# Altium PCB PROC091F_ASCII.PcbDoc (part 7 of 7)
Units mil, origin at the board's own origin, x right, y up, seen from the top; angles counter-clockwise.
Board outline 3590.95 x 906.17 mil, 8 copper layers (Top Layer, GND1, Sig1, PWR1, PWR2, Sig2, GND2, Bottom Layer), stack 63.146 mil thick; 420 components, 316 nets, 1432 pads, 774 vias.
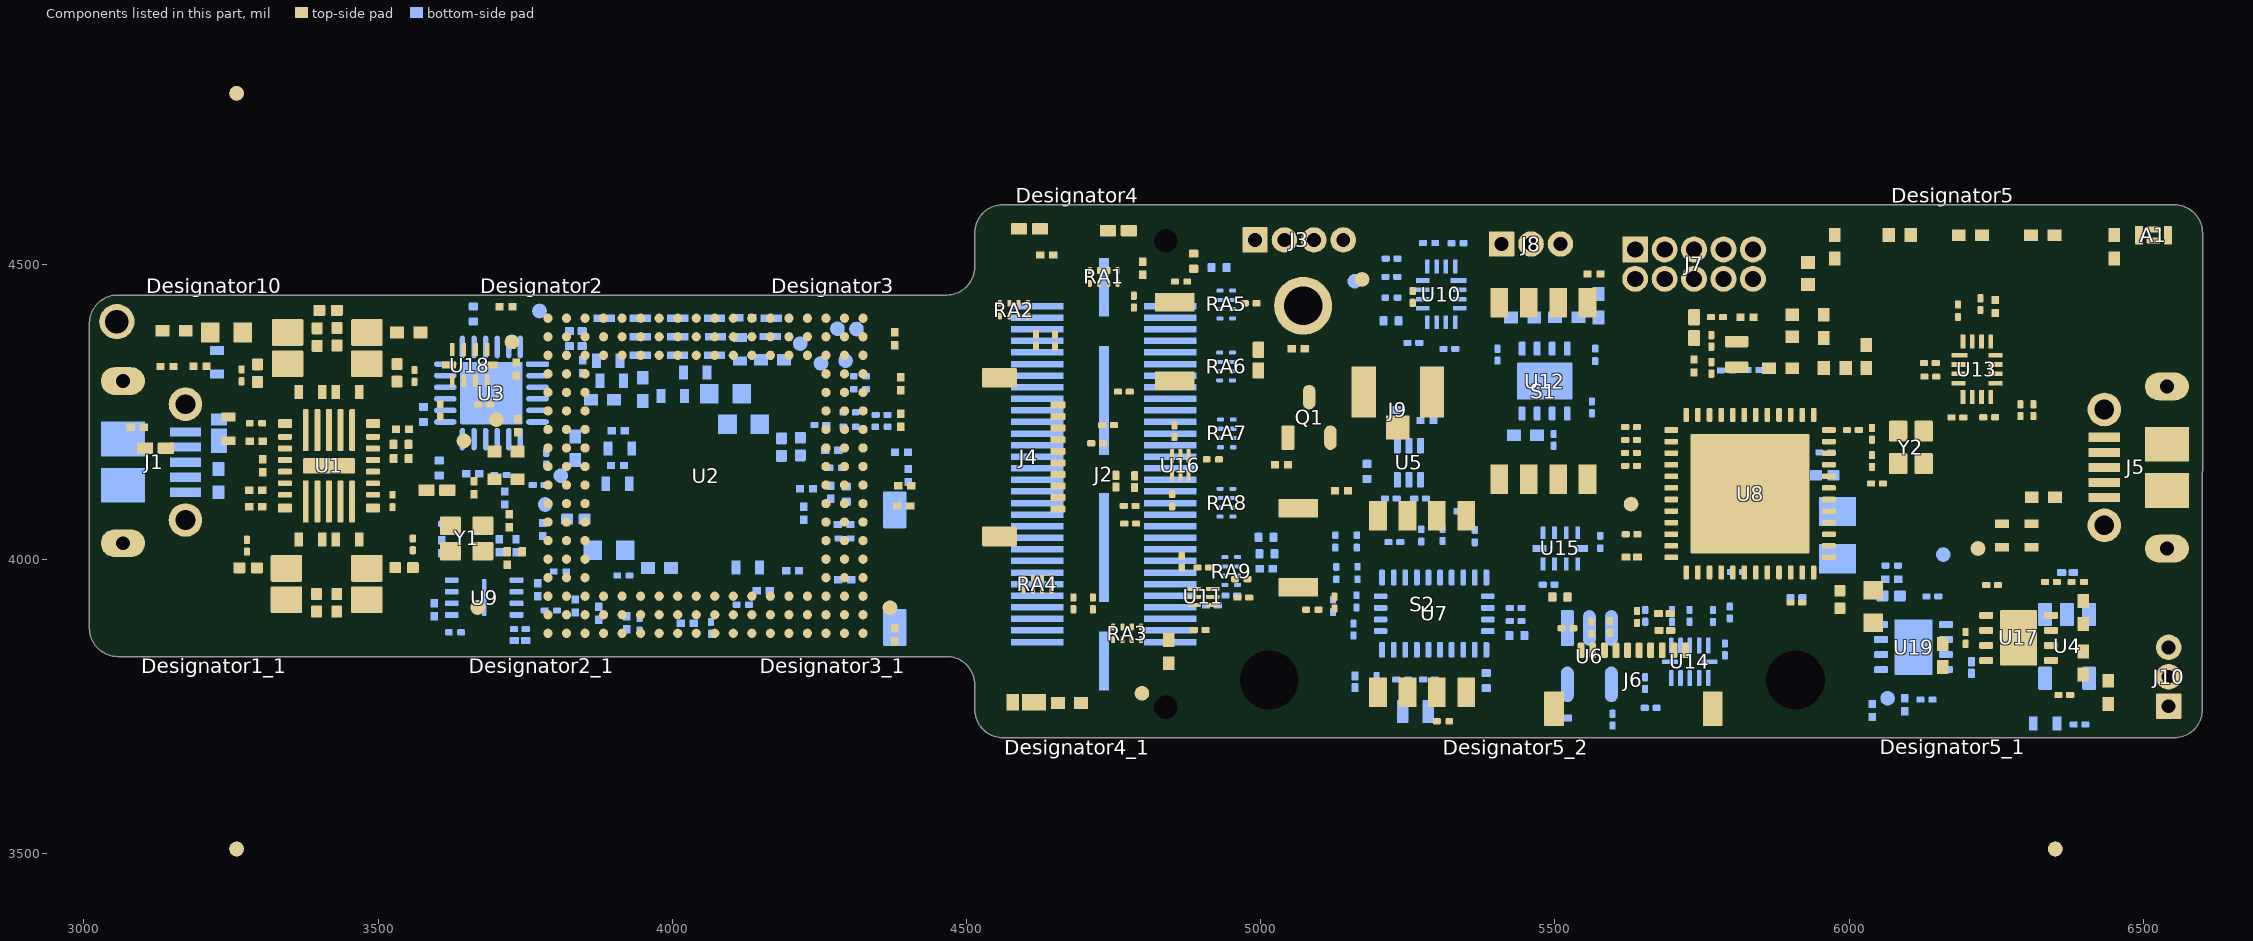
[diagram p13: the components of this part, seen from the top]

## Silkscreen, mask and mechanical layers (free items; w line width, h text height) (continued)
M12 Stackup:
  drawing of 503 lines, arcs and shapes, not listed
  text "Layer" at 8.08,2102.3 h60
  text "Name" at 417.99,2102.3 h60
  text "Material" at 1347.73,2102.3 h60
  text "Thickness" at 2207.5,2102.3 h60
  text "Constant" at 2857.34,2102.3 h60
  text "Board Layer Stack" at 3427.2,2102.3 h60
  text "1" at 8.08,1982.3 h60
  text "Top Overlay" at 417.99,1982.3 h60
  text "2" at 8.08,1862.3 h60
  text "Top Solder" at 417.99,1862.3 h60
  text "Solder Resist" at 1347.73,1862.3 h60
  text "0.50mil" at 2207.5,1862.3 h60
  text "3.5" at 2857.34,1862.3 h60
  text "3" at 8.08,1742.3 h60
  text "Top Layer" at 417.99,1742.3 h60
  text "Copper" at 1347.73,1742.3 h60
  text "1.37mil" at 2207.5,1742.3 h60
  text "4" at 8.08,1622.3 h60
  text "Dielectric1" at 417.99,1622.3 h60
  text "FR-4 High Tg" at 1347.73,1622.3 h60
  text "3.70mil" at 2207.5,1622.3 h60
  text "4.2" at 2857.34,1622.3 h60
  text "5" at 8.08,1502.3 h60
  text "GND1" at 417.99,1502.3 h60
  text "Copper" at 1347.73,1502.3 h60
  text "2.40mil" at 2207.5,1502.3 h60
  text "6" at 8.08,1382.3 h60
  text "Dielectric3" at 417.99,1382.3 h60
  text "FR-4 High Tg" at 1347.73,1382.3 h60
  text "4.50mil" at 2207.5,1382.3 h60
  text "4.2" at 2857.34,1382.3 h60
  text "7" at 8.08,1262.3 h60
  text "Sig1" at 417.99,1262.3 h60
  text "Copper" at 1347.73,1262.3 h60
  text "1.20mil" at 2207.5,1262.3 h60
  text "8" at 8.08,1142.3 h60
  text "Dielectric2" at 417.99,1142.3 h60
  text "FR-4 High Tg" at 1347.73,1142.3 h60
  text "12.00mil" at 2207.5,1142.3 h60
  text "4.2" at 2857.34,1142.3 h60
  text "9" at 8.08,1022.3 h60
  text "PWR1" at 417.99,1022.3 h60
  text "Copper" at 1347.73,1022.3 h60
  text "2.40mil" at 2207.5,1022.3 h60
  text "10" at 8.08,902.3 h60
  text "Dielectric4" at 417.99,902.3 h60
  text "FR-4 High Tg" at 1347.73,902.3 h60
  text "8.00mil" at 2207.5,902.3 h60
  text "4.2" at 2857.34,902.3 h60
  text "11" at 8.08,782.3 h60
  text "PWR2" at 417.99,782.3 h60
  text "Copper" at 1347.73,782.3 h60
  text "2.40mil" at 2207.5,782.3 h60
  text "12" at 8.08,662.3 h60
  text "Dielectric5" at 417.99,662.3 h60
  text "FR-4 High Tg" at 1347.73,662.3 h60
  text "12.00mil" at 2207.5,662.3 h60
  text "4.2" at 2857.34,662.3 h60
  text "13" at 8.08,542.3 h60
  text "Sig2" at 417.99,542.3 h60
  text "Copper" at 1347.73,542.3 h60
  text "1.20mil" at 2207.5,542.3 h60
  text "14" at 8.08,422.3 h60
  text "Dielectric8" at 417.99,422.3 h60
  text "FR-4 High Tg" at 1347.73,422.3 h60
  text "4.50mil" at 2207.5,422.3 h60
  text "4.2" at 2857.34,422.3 h60
  text "15" at 8.08,302.3 h60
  text "GND2" at 417.99,302.3 h60
  text "Copper" at 1347.73,302.3 h60
  text "2.40mil" at 2207.5,302.3 h60
  text "16" at 8.08,182.3 h60
  text "Dielectric9" at 417.99,182.3 h60
  text "FR-4 High Tg" at 1347.73,182.3 h60
  text "3.70mil" at 2207.5,182.3 h60
  text "4.2" at 2857.34,182.3 h60
  text "17" at 8.08,62.3 h60
  text "Bottom Layer" at 417.99,62.3 h60
  text "Copper" at 1347.73,62.3 h60
  text "1.37mil" at 2207.5,62.3 h60
  text "18" at 8.08,-57.7 h60
  text "Bottom Solder" at 417.99,-57.7 h60
  text "Solder Resist" at 1347.73,-57.7 h60
  text "0.50mil" at 2207.5,-57.7 h60
  text "3.5" at 2857.34,-57.7 h60
  text "19" at 8.08,-177.7 h60
  text "Bottom Overlay" at 417.99,-177.7 h60
  text ".Layer_Name" at 577,-858.49 h60
M13 Component Bodies Top:
  text ".Layer_Name" at 577,-858.49 h60
M14 Component Bodies Bottom:
  text ".Layer_Name" at 577,-858.49 h60
M15 Courtyards Top:
  text ".Layer_Name" at 577,-858.49 h60
M16 Courtyards Bottom:
  text ".Layer_Name" at 577,-858.49 h60
Drill Drawing:
  circle w10: c7603.25,4734.77 r16.58
  circle w10: c7603.25,4734.77 r27.63
  circle w10: c7603.25,3367.25 r27.63
  lines w10: 7575.63,3463.95 7603.25,3477.76 7630.88,3463.95 7617.07,3491.57 7630.88,3519.2 7603.25,3505.39 7575.63,3519.2 7589.44,3491.57 7575.63,3463.95 ; 7575.63,3602.08 7589.44,3602.08 7603.25,3588.27 7617.07,3602.08 7630.88,3602.08 7617.07,3615.89 7630.88,3629.71 7617.07,3629.71 7603.25,3643.52 7589.44,3629.71 7575.63,3629.71 7589.44,3615.89 7575.63,3602.08 ; 7575.63,3726.4 7589.44,3726.4 7589.44,3712.59 7617.07,3712.59 7617.07,3726.4 7630.88,3726.4 7630.88,3754.03 7617.07,3754.03 7617.07,3767.84 7589.44,3767.84 7589.44,3754.03 7575.63,3754.03 7575.63,3726.4 ; 7575.63,3836.91 7603.25,3850.72 7630.88,3836.91 7617.07,3864.53 7630.88,3892.16 7603.25,3878.35 7575.63,3892.16 7589.44,3864.53 7575.63,3836.91 ; 7575.63,3988.85 7603.25,3961.23 7630.88,3988.85 7603.25,4016.48 7575.63,3988.85 ; 7575.63,4099.36 7589.44,4099.36 7589.44,4085.55 7617.07,4085.55 7617.07,4099.36 7630.88,4099.36 7630.88,4126.99 7617.07,4126.99 7617.07,4140.8 7589.44,4140.8 7589.44,4126.99 7575.63,4126.99 7575.63,4099.36 ; 7575.63,4265.12 7630.88,4265.12 7603.25,4209.87 7575.63,4265.12 ; 7575.63,4334.19 7575.63,4348 7589.44,4361.81 7575.63,4375.63 7575.63,4389.44 7589.44,4389.44 7603.25,4375.63 7617.07,4389.44 7630.88,4389.44 7630.88,4375.63 7617.07,4361.81 7630.88,4348 7630.88,4334.19 7617.07,4334.19 7603.25,4348 7589.44,4334.19 7575.63,4334.19 ; 7575.63,4458.51 7630.88,4458.51 7630.88,4513.76 7575.63,4513.76 7575.63,4458.51 ; 7575.63,4638.08 7630.88,4638.08 7603.25,4582.83 7575.63,4638.08 ; 7575.63,4831.47 7630.88,4831.47 7630.88,4886.72 7575.63,4886.72 7575.63,4831.47 ; 7586.68,3475 7603.25,3483.28 7619.83,3475 7611.54,3491.57 7619.83,3508.15 7603.25,3499.86 7586.68,3508.15 7594.97,3491.57 7586.68,3475 ; 7586.68,4104.88 7594.97,4104.88 7594.97,4096.6 7611.54,4096.6 7611.54,4104.88 7619.83,4104.88 7619.83,4121.46 7611.54,4121.46 7611.54,4129.75 7594.97,4129.75 7594.97,4121.46 7586.68,4121.46 7586.68,4104.88 ; 7586.68,4627.03 7619.83,4627.03 7603.25,4593.88 7586.68,4627.03 ; 7586.68,4842.52 7619.83,4842.52 7619.83,4875.67 7586.68,4875.67 7586.68,4842.52
  lines w12: 7525.54,3302.33 10757.03,3302.33 ; 7525.54,4918.49 10757.03,4918.49 ; 7863.4,3178.01 7863.4,5042.81 ; 8195.4,3178.01 8195.4,5042.81 ; 8831.96,3178.01 8831.96,5042.81 ; 9091.1,3178.01 9091.1,5042.81 ; 9466.26,3178.01 9466.26,5042.81 ; 10190.59,3178.01 10190.59,5042.81 ; 7525.54,3178.01 10757.03,3178.01 10757.03,5042.81 7525.54,5042.81 7525.54,3178.01
  text "Symbol" at 7600.13,4955.79 h72
  text "Quantity" at 7900.7,4955.79 h72
  text "Finished Hole Size" at 8232.7,4955.79 h72
  text "Plated" at 8869.26,4955.79 h72
  text "Hole Type" at 9128.4,4955.79 h72
  text "Drill Layer Pair" at 9503.56,4955.79 h72
  text "Hole Tolerance" at 10227.89,4955.79 h72
  text "36" at 7900.7,4831.47 h60
  text "7.87mil" at 8232.7,4831.47 h60
  text "PTH" at 8869.26,4831.47 h60
  text "Round" at 9128.4,4831.47 h60
  text "Top Layer - Bottom Layer" at 9503.56,4831.47 h60
  text "626" at 7900.7,4707.15 h60
  text "8.00mil" at 8232.7,4707.15 h60
  text "PTH" at 8869.26,4707.15 h60
  text "Round" at 9128.4,4707.15 h60
  text "Top Layer - Bottom Layer" at 9503.56,4707.15 h60
  text "112" at 7900.7,4582.83 h60
  text "8.00mil" at 8232.7,4582.83 h60
  text "PTH" at 8869.26,4582.83 h60
  text "Round" at 9128.4,4582.83 h60
  text "Top Layer - Bottom Layer" at 9503.56,4582.83 h60
  text "+/-3.00mil" at 10227.89,4582.83 h60
  text "10" at 7900.7,4458.51 h60
  text "23.62mil" at 8232.7,4458.51 h60
  text "PTH" at 8869.26,4458.51 h60
  text "Round" at 9128.4,4458.51 h60
  text "Top Layer - Bottom Layer" at 9503.56,4458.51 h60
  text "4" at 7900.7,4334.19 h60
  text "23.62mil" at 8232.7,4334.19 h60
  text "PTH" at 8869.26,4334.19 h60
  text "Slot" at 9128.4,4334.19 h60
  text "Top Layer - Bottom Layer" at 9503.56,4334.19 h60
  text "10" at 7900.7,4209.87 h60
  text "27.56mil" at 8232.7,4209.87 h60
  text "PTH" at 8869.26,4209.87 h60
  text "Round" at 9128.4,4209.87 h60
  text "Top Layer - Bottom Layer" at 9503.56,4209.87 h60
  text "33" at 7900.7,4085.55 h60
  text "32.00mil" at 8232.7,4085.55 h60
  text "NPTH" at 8869.26,4085.55 h60
  text "Round" at 9128.4,4085.55 h60
  text "Top Layer - Bottom Layer" at 9503.56,4085.55 h60
  text "4" at 7900.7,3961.23 h60
  text "33.47mil" at 8232.7,3961.23 h60
  text "PTH" at 8869.26,3961.23 h60
  text "Round" at 9128.4,3961.23 h60
  text "Top Layer - Bottom Layer" at 9503.56,3961.23 h60
  text "1" at 7900.7,3836.91 h60
  text "40.00mil" at 8232.7,3836.91 h60
  text "PTH" at 8869.26,3836.91 h60
  text "Round" at 9128.4,3836.91 h60
  text "Top Layer - Bottom Layer" at 9503.56,3836.91 h60
  text "2" at 7900.7,3712.59 h60
  text "40.16mil" at 8232.7,3712.59 h60
  text "NPTH" at 8869.26,3712.59 h60
  text "Round" at 9128.4,3712.59 h60
  text "Top Layer - Bottom Layer" at 9503.56,3712.59 h60
  text "1" at 7900.7,3588.27 h60
  text "64.96mil" at 8232.7,3588.27 h60
  text "PTH" at 8869.26,3588.27 h60
  text "Round" at 9128.4,3588.27 h60
  text "Top Layer - Bottom Layer" at 9503.56,3588.27 h60
  text "4" at 7900.7,3463.95 h60
  text "88.00mil" at 8232.7,3463.95 h60
  text "NPTH" at 8869.26,3463.95 h60
  text "Round" at 9128.4,3463.95 h60
  text "Top Layer - Bottom Layer" at 9503.56,3463.95 h60
  text "+/-3.00mil" at 10227.89,3463.95 h60
  text "2" at 7900.7,3339.63 h60
  text "100.00mil" at 8232.7,3339.63 h60
  text "NPTH" at 8869.26,3339.63 h60
  text "Round" at 9128.4,3339.63 h60
  text "Top Layer - Bottom Layer" at 9503.56,3339.63 h60
  text "+/-3.00mil" at 10227.89,3339.63 h60
  text "845 Total" at 7900.7,3215.31 h60
  text "Slot definitions :" at 7600.13,3128.28 h60
  text "Routed Path Length" at 8050.85,3128.28 h60
  text "= Calculated from tool start centre position to tool end centre position." at 8590.58,3128.28 h60
  text "Hole Length" at 8050.85,3078.55 h60
  text "= Routed Path Length + Tool Size = Slot length as defined in the PCB layout" at 8390.78,3078.55 h60
  text ".Layer_Name" at 577,-858.49 h60
M17 Embedded Cavity:
  text ".Layer_Name" at 577,-858.49 h60
M18 Embedded Assembly:
  text ".Layer_Name" at 577,-858.49 h60
M19 Embedded Keepout:
  text ".Layer_Name" at 577,-858.49 h60
Mechanical 21:
  text "Works With TI LaunchPad Logo1" at 56021.02,58034.06 h60
  text "Works With TI LaunchPad Logo1" at 56021.02,58034.06 h60
  text "Logo2" at 54657.52,57702.56 h60
  text "Logo2" at 54657.52,57702.56 h60
  text "LOGO3" at 54889.02,57440.06 h60
  text "LOGO3" at 54889.02,57440.06 h60
  text "FID1" at 55092.65,56736 h60
  text "FID1" at 55092.65,56736 h60
  text "FID2" at 55391.65,56726 h60
  text "FID2" at 55391.65,56726 h60
  text "FID6" at 55107.5,56532.5 h60
  text "FID6" at 55107.5,56532.5 h60
  text "FID5" at 55387.5,56532.5 h60
  text "FID5" at 55387.5,56532.5 h60
  text "FID4" at 55668.5,56532.5 h60
  text "FID4" at 55668.5,56532.5 h60
  text "FID3" at 55948.5,56532.5 h60
  text "FID3" at 55948.5,56532.5 h60
  text "ESD Susceptible1" at 56694.52,56524.06 h60
  text "ESD Susceptible1" at 56694.52,56524.06 h60
  text "CAUTION HOT SURFACE1" at 57228.02,56277.06 h60
  text "CAUTION HOT SURFACE1" at 57228.02,56277.06 h60
  text "For evaluation only; not FCC approved for resale." at 54661.42,56095.48 h60 r90
  text "For evaluation only; not FCC approved for resale." at 54661.42,56095.48 h60 r90
  text "Logo1" at 54419.02,55121.06 h60
  text "Logo1" at 54419.02,55121.06 h60
  text "R73" at 57212.4,54825.61 h60
  text "R73" at 57212.4,54825.61 h60
  text "J17" at 56047,54802 h60
  text "J17" at 56047,54802 h60
  text "J4" at 57338,54802 h60
  text "J4" at 57338,54802 h60
  text "J3" at 58017,54787 h60
  text "J3" at 58017,54787 h60
  text "R14" at 57970,54727 h60
  text "R14" at 57970,54727 h60
  text "Q2" at 58016.76,54608.4 h60
  text "Q2" at 58016.76,54608.4 h60
  text "R128" at 57968,54595 h60
  text "R128" at 57968,54595 h60
  text "DS2" at 58182.15,54571 h60
  text "DS2" at 58182.15,54571 h60
  text "R118" at 58197,54456 h60
  text "R118" at 58197,54456 h60
  text "D4" at 58067.44,54360.39 h60
  text "D4" at 58067.44,54360.39 h60
  text "R351" at 57689,54352 h60
  text "R351" at 57689,54352 h60
  text "R350" at 57689,54300 h60
  text "R350" at 57689,54300 h60
  text "R220" at 57803,54206 h60
  text "R220" at 57803,54206 h60
  text "R223" at 57737.75,53914.35 h60
  text "R223" at 57737.75,53914.35 h60
  text "R227" at 57977.49,53913.76 h60
  text "R227" at 57977.49,53913.76 h60
  text "R190" at 56624.85,53824.59 h60
  text "R190" at 56624.85,53824.59 h60
  text "R189" at 56679.85,53824.59 h60
  text "R189" at 56679.85,53824.59 h60
  text "J15" at 57338.02,53806.06 h60
  text "J15" at 57338.02,53806.06 h60
  text "C66" at 56801.85,53741.59 h60
  text "C66" at 56801.85,53741.59 h60
  text "R67" at 57504.63,53724 h60
  text "R67" at 57504.63,53724 h60
  text "C67" at 56534.85,53719.59 h60
  text "R196" at 56534.85,53719.59 h60
  text "C67" at 56534.85,53719.59 h60
  text "R196" at 56534.85,53719.59 h60
  text "R192" at 56584.85,53719.59 h60
  text "R192" at 56584.85,53719.59 h60
  text "R195" at 56634.85,53719.59 h60
  text "R195" at 56634.85,53719.59 h60
  text "R194" at 56684.85,53719.59 h60
  text "R194" at 56684.85,53719.59 h60
  text "R184" at 56801.85,53719.59 h60
  text "R184" at 56801.85,53719.59 h60
  text "R183" at 56854.85,53719.59 h60
  text "R183" at 56854.85,53719.59 h60
  text "R182" at 56904.85,53719.59 h60
  text "R182" at 56904.85,53719.59 h60
  text "R198" at 56397,53660 h60
  text "R198" at 56397,53660 h60
  text "R70" at 57504.63,53624 h60
  text "R70" at 57504.63,53624 h60
  text "U15" at 56578.85,53601.59 h60
  text "U15" at 56578.85,53601.59 h60
  text "R204" at 57113.07,53589.4 h60
  text "R204" at 57113.07,53589.4 h60
  text "R162" at 56492,53581 h60
  text "R162" at 56492,53581 h60
  text "R60" at 57501,53579 h60
  text "R60" at 57501,53579 h60
  text "R161" at 56492,53544 h60
  text "R161" at 56492,53544 h60
  text "R72" at 57727.07,53524 h60
  text "R72" at 57727.07,53524 h60
  text "R199" at 56330,53492.43 h60
  text "R199" at 56330,53492.43 h60
  text "J10" at 55887,53488 h60
  text "J10" at 55887,53488 h60
  text "R64" at 57718,53480 h60
  text "R64" at 57718,53480 h60
  text "R152" at 57977.49,53479.76 h60
  text "R152" at 57977.49,53479.76 h60
  text "C53" at 57216.92,53466.99 h60
  text "C53" at 57216.92,53466.99 h60
  text "L6" at 57283.85,53449.59 h60
  text "L6" at 57283.85,53449.59 h60
  text "C56" at 57111.85,53444.59 h60
  text "C56" at 57111.85,53444.59 h60
  text "C54" at 57163.92,53444.99 h60
  text "C54" at 57163.92,53444.99 h60
  text "R218" at 56330,53437.43 h60
  text "R218" at 56330,53437.43 h60
  text "R76" at 57727.07,53424 h60
  text "R76" at 57727.07,53424 h60
  text "R200" at 56316.85,53386.59 h60
  text "R200" at 56316.85,53386.59 h60
  text "U7" at 57968.92,53371.46 h60
  text "U7" at 57968.92,53371.46 h60
  text "R81" at 57504.02,53324 h60
  text "R81" at 57504.02,53324 h60
  text "R78" at 57727,53324 h60
  text "R78" at 57727,53324 h60
  text "C36" at 56457.8,53322.99 h60
  text "C36" at 56457.8,53322.99 h60
  text "R201" at 57132.85,53319.59 h60
  text "R201" at 57132.85,53319.59 h60
  text "R206" at 56316.85,53286.59 h60
  text "R206" at 56316.85,53286.59 h60
  text "C52" at 57132.85,53269.59 h60
  text "C52" at 57132.85,53269.59 h60
  text "R207" at 56316.85,53236.59 h60
  text "R207" at 56316.85,53236.59 h60
  text "R85" at 57725,53225 h60
  text "R85" at 57725,53225 h60
  text "C51" at 57131.85,53216.59 h60
  text "C51" at 57131.85,53216.59 h60
  text "R208" at 56316.85,53186.59 h60
  text "R208" at 56316.85,53186.59 h60
  text "R394" at 57716,53187 h60
  text "R394" at 57716,53187 h60
  text "R393" at 57755,53185 h60
  text "R393" at 57755,53185 h60
  text "R61" at 57501,53174 h60
  text "R61" at 57501,53174 h60
  text "L5" at 57153.52,53152.08 h60
  text "L5" at 57153.52,53152.08 h60
  text "C59" at 56452,53137 h60
  text "C59" at 56452,53137 h60
  text "R89" at 57732,53111 h60
  text "R89" at 57732,53111 h60
  text "C58" at 56436.57,53084.4 h60
  text "C58" at 56436.57,53084.4 h60
  text "Y2" at 57122.77,53068.99 h60
  text "Y2" at 57122.77,53068.99 h60
  text "C57" at 56972.85,53059.59 h60
  text "C57" at 56972.85,53059.59 h60
  text "C70" at 56589.23,53056.59 h60
  text "C70" at 56589.23,53056.59 h60
  text "C68" at 56737.85,53056.59 h60
  text "C68" at 56737.85,53056.59 h60
  text "J19" at 58033,53057 h60
  text "J19" at 58033,53057 h60
  text "C69" at 56479.07,53037.4 h60
  text "C69" at 56479.07,53037.4 h60
  text "R90" at 57504.63,53024 h60
  text "R90" at 57504.63,53024 h60
  text "R91" at 57727.07,53024 h60
  text "R91" at 57727.07,53024 h60
  text "R150" at 56532,53006 h60
  text "R150" at 56532,53006 h60
  text "C42" at 56567.65,53006 h60
  text "C42" at 56567.65,53006 h60
  text "C30" at 56412.02,52997.6 h60
  text "C30" at 56412.02,52997.6 h60
  text "R95" at 57721,52978 h60
  text "R95" at 57721,52978 h60
  text "R210" at 56479.85,52975.59 h60
  text "R210" at 56479.85,52975.59 h60
  text "R211" at 56550.85,52975.59 h60
  text "R211" at 56550.85,52975.59 h60
  text "R212" at 56580.85,52975.59 h60
  text "R212" at 56580.85,52975.59 h60
  text "R213" at 56631.85,52975.59 h60
  text "R213" at 56631.85,52975.59 h60
  text "R214" at 56682.85,52975.59 h60
  text "R214" at 56682.85,52975.59 h60
  text "R215" at 56733.85,52975.59 h60
  text "R215" at 56733.85,52975.59 h60
  text "R216" at 56784.85,52975.59 h60
  text "R216" at 56784.85,52975.59 h60
  text "R217" at 56833.85,52975.59 h60
  text "R217" at 56833.85,52975.59 h60
  text "U6" at 56399.87,52935.6 h60
  text "U6" at 56399.87,52935.6 h60
  text "R93" at 57504.63,52924 h60
  text "R93" at 57504.63,52924 h60
  text "R92" at 57727.07,52924 h60
  text "R92" at 57727.07,52924 h60
  text "C29" at 56337.49,52919.55 h60
  text "C29" at 56337.49,52919.55 h60
  text "C28" at 56582,52907 h60
  text "C28" at 56582,52907 h60
  text "R187" at 57077,52877 h60
  text "R187" at 57077,52877 h60
  text "R193" at 57181.62,52877 h60
  text "R193" at 57181.62,52877 h60
  text "C55" at 57312,52877 h60
  text "C55" at 57312,52877 h60
  text "U17" at 56762,52840 h60
  text "U17" at 56762,52840 h60
  text "R185" at 57076.48,52827.58 h60
  text "R185" at 57076.48,52827.58 h60
  text "R186" at 57182,52827 h60
  text "R186" at 57182,52827 h60
  text "R181" at 57312,52827 h60
  text "R181" at 57312,52827 h60
  text "R94" at 57504.63,52824 h60
  text "R94" at 57504.63,52824 h60
  text "C62" at 56584.37,52807.06 h60
  text "C62" at 56584.37,52807.06 h60
  text "R304" at 57236,52750 h60
  text "R304" at 57236,52750 h60
  text "R221" at 56507.09,52747.53 h60
  text "R221" at 56507.09,52747.53 h60
  text "U20" at 57186,52741 h60
  text "U20" at 57186,52741 h60
  text "C65" at 56602,52736.38 h60
  text "C65" at 56602,52736.38 h60
  text "C7" at 57154.28,52735.36 h60
  text "C7" at 57154.28,52735.36 h60
  text "J13" at 56412,52725 h60
  text "J13" at 56412,52725 h60
  text "R306" at 57237,52708 h60
  text "R306" at 57237,52708 h60
  text "SW1" at 57858.65,52699 h60
  text "SW1" at 57858.65,52699 h60
  text "U25" at 56979,52678 h60
  text "U25" at 56979,52678 h60
  text "R310" at 57415,52671 h60
  text "R310" at 57415,52671 h60
  text "R151" at 56897,52642 h60
  text "R151" at 56897,52642 h60
  text "R311" at 57415,52636 h60
  text "R311" at 57415,52636 h60
  text "S7" at 56399,52624 h60
  text "S7" at 56399,52624 h60
  text "R301" at 57372,52599 h60
  text "R301" at 57372,52599 h60
  text "C73" at 56262.62,52569.53 h60
  text "C73" at 56262.62,52569.53 h60
  text "R338" at 56787.37,52555.06 h60
  text "R338" at 56787.37,52555.06 h60
  text "U26" at 56919.12,52539.06 h60
  text "U26" at 56919.12,52539.06 h60
  text "R209" at 56801,52497 h60
  text "R209" at 56801,52497 h60
  text "S10" at 56399,52494 h60
  text "S10" at 56399,52494 h60
  text "C27" at 56283.06,52418 h60
  text "C27" at 56283.06,52418 h60
  text "C50" at 55666,52407 h60
  text "C50" at 55666,52407 h60
  text "S5" at 56399,52381 h60
  text "S5" at 56399,52381 h60
  text "U28" at 56817,52365 h60
  text "U28" at 56817,52365 h60
  text "J14" at 57878.02,52346.06 h60
  text "J14" at 57878.02,52346.06 h60
  text "R24" at 56760,52338 h60
  text "R24" at 56760,52338 h60
  text "U11" at 57728.34,52328.92 h60
  text "U11" at 57728.34,52328.92 h60
  text "R339" at 56204.5,52306.5 h60
  text "R339" at 56204.5,52306.5 h60
  text "S6" at 56399,52288 h60
  text "S6" at 56399,52288 h60
  text "R25" at 56350,52285 h60
  text "R25" at 56350,52285 h60
  text "R16" at 56048,52270.5 h60
  text "R16" at 56048,52270.5 h60
  text "C72" at 55979,52269.62 h60
  text "C72" at 55979,52269.62 h60
  text "R173" at 57089,52231 h60
  text "R173" at 57089,52231 h60
  text "C94" at 56205,52229 h60
  text "C94" at 56205,52229 h60
  text "R18" at 56764,52229 h60
  text "R18" at 56764,52229 h60
  text "U33" at 56923.22,52200.19 h60
  text "U33" at 56923.22,52200.19 h60
  text "U19" at 57072,52191 h60
  text "U19" at 57072,52191 h60
  text "R175" at 57160.32,52177.62 h60
  text "R175" at 57160.32,52177.62 h60
  text "S11" at 56399,52175 h60
  text "S11" at 56399,52175 h60
  text "R41" at 56339.02,52156.06 h60
  text "R41" at 56339.02,52156.06 h60
  text "SW2" at 58116.65,52147 h60
  text "SW2" at 58116.65,52147 h60
  text "R19" at 56771,52133 h60
  text "R19" at 56771,52133 h60
  text "C112" at 56048,52118 h60
  text "C112" at 56048,52118 h60
  text "C117" at 56270.24,52116 h60
  text "C117" at 56270.24,52116 h60
  text "C49" at 57105,52095 h60
  text "C49" at 57105,52095 h60
  text "R180" at 57145,52095 h60
  text "R180" at 57145,52095 h60
  text "R172" at 57063,52089 h60
  text "R172" at 57063,52089 h60
  text "LBL1" at 58550.37,52085.06 h60
  text "LBL1" at 58550.37,52085.06 h60
  text "J9" at 55627.11,52069.11 h60
  text "J9" at 55627.11,52069.11 h60
  text "S3" at 56339,52044 h60
  text "S3" at 56339,52044 h60
  text "R8" at 56993,52019 h60
  text "R8" at 56993,52019 h60
  text "U1" at 56726,52004 h60
  text "U1" at 56726,52004 h60
  text "R229" at 56004.36,51991.59 h60
  text "R229" at 56004.36,51991.59 h60
  text "C2" at 56692,51990.69 h60
  text "C2" at 56692,51990.69 h60
  text "C4" at 57710.2,51977.88 h60
  text "C4" at 57710.2,51977.88 h60
  text "U32" at 56133,51977 h60
  text "U32" at 56133,51977 h60
  text "R1" at 57048,51952 h60
  text "R1" at 57048,51952 h60
  text "R117" at 57862.62,51943.53 h60
  text "R117" at 57862.62,51943.53 h60
  text "R144" at 56003.74,51942.05 h60
  text "R144" at 56003.74,51942.05 h60
  text "R3" at 56919,51937 h60
  text "R3" at 56919,51937 h60
  text "Q1" at 57946.65,51928 h60
  text "Q1" at 57946.65,51928 h60
  text "R261" at 57830.74,51910.17 h60
  text "R261" at 57830.74,51910.17 h60
  text "R54" at 56005,51891 h60
  text "R54" at 56005,51891 h60
  text "DS1" at 58120,51890 h60
  text "DS1" at 58120,51890 h60
  text "C76" at 56572.13,51859.91 h60
  text "C76" at 56572.13,51859.91 h60
  text "S1" at 57770.72,51851 h60
  text "S1" at 57770.72,51851 h60
  text "L7" at 56445.37,51847.06 h60
  text "L7" at 56445.37,51847.06 h60
  text "R270" at 56005,51841 h60
  text "R270" at 56005,51841 h60
  text "R6" at 57000,51841 h60
  text "R6" at 57000,51841 h60
  text "J28" at 56344.97,51821.39 h60
  text "J28" at 56344.97,51821.39 h60
  text "R260" at 57790,51821 h60
  text "R260" at 57790,51821 h60
  text "C111" at 56141.07,51805 h60
  text "C111" at 56141.07,51805 h60
  text "U3" at 56906,51797 h60
  text "U3" at 56906,51797 h60
  text "U12" at 56512.86,51794.81 h60
  text "U12" at 56512.86,51794.81 h60
  text "R269" at 56005,51791 h60
  text "R269" at 56005,51791 h60
  text "R113" at 56205.45,51785.73 h60
  text "R113" at 56205.45,51785.73 h60
  text "J1" at 57964,51782 h60
  text "J1" at 57964,51782 h60
  text "R268" at 56005,51736 h60
  text "R268" at 56005,51736 h60
  text "H2" at 59278.02,51732.06 h60
  text "H2" at 59278.02,51732.06 h60
  text "R256" at 56477.37,51691.06 h60
  text "R256" at 56477.37,51691.06 h60
  text "R30" at 56005,51686 h60
  text "R30" at 56005,51686 h60
  text "R321" at 57316,51648 h60
  text "R321" at 57316,51648 h60
  text "R29" at 56005,51636 h60
  text "R29" at 56005,51636 h60
  text "R324" at 57296,51608 h60
  text "R324" at 57296,51608 h60
  text "Logo4" at 58802.02,51607.06 h60
  text "Logo4" at 58802.02,51607.06 h60
  text "U23" at 57286.85,51605.4 h60
  text "U23" at 57286.85,51605.4 h60
  text "C3" at 57912.37,51605.06 h60
  text "C3" at 57912.37,51605.06 h60
  text "C26" at 57052.91,51598.66 h60
  text "C26" at 57052.91,51598.66 h60
  text "H1" at 58428.02,51592.06 h60
  text "H1" at 58428.02,51592.06 h60
  text "R28" at 56005,51581 h60
  text "R28" at 56005,51581 h60
  text "R313" at 56661.74,51578.44 h60
  text "R313" at 56661.74,51578.44 h60
  text "R331" at 57329.82,51571.99 h60
  text "R331" at 57329.82,51571.99 h60
  text "D11" at 56775.76,51570.07 h60
  text "D11" at 56775.76,51570.07 h60
  text "R291" at 56531,51569 h60
  text "R291" at 56531,51569 h60
  text "C81" at 57580,51554 h60
  text "C81" at 57580,51554 h60
  text "R317" at 57316.07,51536.47 h60
  text "R317" at 57316.07,51536.47 h60
  text "R27" at 56005,51531 h60
  text "R27" at 56005,51531 h60
  text "L9" at 56729,51530 h60
  text "L9" at 56729,51530 h60
  text "P1" at 56364.86,51510 h60
  text "P1" at 56364.86,51510 h60
  text "R396" at 56236,51508 h60
  text "R396" at 56236,51508 h60
  text "R332" at 57303,51501 h60
  text "R332" at 57303,51501 h60
  text "R397" at 56156,51488 h60
  text "R397" at 56156,51488 h60
  text "R21" at 56005,51481 h60
  text "R21" at 56005,51481 h60
  text "C120" at 56233,51472 h60
  text "C120" at 56233,51472 h60
  text "U30" at 56169,51440 h60
  text "U30" at 56169,51440 h60
  text "R20" at 56005,51431 h60
  text "R20" at 56005,51431 h60
  text "R271" at 57433.29,51414.06 h60
  text "R271" at 57433.29,51414.06 h60
  text "C82" at 57571,51411 h60
  text "C82" at 57571,51411 h60
  text "R395" at 56133.32,51388.04 h60
  text "R395" at 56133.32,51388.04 h60
  text "R246" at 56005,51381 h60
  text "R246" at 56005,51381 h60
  text "C78" at 57741,51368 h60
  text "C78" at 57741,51368 h60
  text "J2" at 57964,51337 h60
  text "J2" at 57964,51337 h60
  text "R243" at 56005,51331 h60
  text "R243" at 56005,51331 h60
  text "L8" at 57711,51315 h60
  text "L8" at 57711,51315 h60
  text "R309" at 56935.21,51298.07 h60
  text "R309" at 56935.21,51298.07 h60
  text "U13" at 57467,51295 h60
  text "U13" at 57467,51295 h60
  text "C88" at 56223,51294 h60
  text "C88" at 56223,51294 h60
  text "C108" at 56561,51275 h60
  text "C108" at 56561,51275 h60
  text "U29" at 56752,51266 h60
  text "U29" at 56752,51266 h60
  text "J27" at 56378.3,51228.62 h60
  text "J27" at 56378.3,51228.62 h60
  text "R115" at 56222.08,51202.58 h60
  text "R115" at 56222.08,51202.58 h60
  text "C99" at 57036,51199 h60
  text "C99" at 57036,51199 h60
  text "H3" at 59278.02,51192.06 h60
  text "H3" at 59278.02,51192.06 h60
  text "C100" at 56947,51182 h60
  text "C100" at 56947,51182 h60
  text "H4" at 59658.02,51182.06 h60
  text "H4" at 59658.02,51182.06 h60
  text "H5" at 60008.02,51182.06 h60
  text "H5" at 60008.02,51182.06 h60
  text "U31" at 56061,51181 h60
  text "U31" at 56061,51181 h60
  text "C102" at 56496,51175 h60
  text "C102" at 56496,51175 h60
  text "H6" at 60368.02,51172.06 h60
  text "H6" at 60368.02,51172.06 h60
  text "C103" at 56629,51171 h60
  text "C103" at 56629,51171 h60
  text "C87" at 57290,51136 h60
  text "C87" at 57290,51136 h60
  text "R318" at 58884.02,51117.68 h60
  text "R318" at 58884.02,51117.68 h60
  text "R315" at 58534.02,51114.06 h60
  text "R315" at 58534.02,51114.06 h60
  text "C91" at 57811,51090 h60
  text "C91" at 57811,51090 h60
  text "R131" at 55699.43,51041.54 h60
  text "R131" at 55699.43,51041.54 h60
  text "C97" at 56692.79,51024.94 h60
  text "C97" at 56692.79,51024.94 h60
  text "C109" at 56067,50998 h60
  text "C109" at 56067,50998 h60
  text "R140" at 55967.43,50996.54 h60
  text "R140" at 55967.43,50996.54 h60
  text "R133" at 55707.43,50987.54 h60
  text "R133" at 55707.43,50987.54 h60
  text "R139" at 55829.43,50987.54 h60
  text "R139" at 55829.43,50987.54 h60
  text "C79" at 57637.52,50972.56 h60
  text "C79" at 57637.52,50972.56 h60
  text "R135" at 55624.43,50940.54 h60
  text "R135" at 55624.43,50940.54 h60
  text "R136" at 55745.43,50940.54 h60
  text "R136" at 55745.43,50940.54 h60
  text "R141" at 55876.43,50932.54 h60
  text "R141" at 55876.43,50932.54 h60
  text "R134" at 55707.43,50906.54 h60
  text "R134" at 55707.43,50906.54 h60
  text "R138" at 55829.43,50906.54 h60
  text "R138" at 55829.43,50906.54 h60
  text "R132" at 55625.43,50905.54 h60
  text "R132" at 55625.43,50905.54 h60
  text "R137" at 55745.43,50905.54 h60
  text "R137" at 55745.43,50905.54 h60
  text "R143" at 55876.43,50897.54 h60
  text "R143" at 55876.43,50897.54 h60
  text "R116" at 57765.62,50891.53 h60
  text "R116" at 57765.62,50891.53 h60
  text "P7" at 57484.37,50880.06 h60
  text "P7" at 57484.37,50880.06 h60
  text "P3" at 57606.37,50880.06 h60
  text "P3" at 57606.37,50880.06 h60
  text "TP1" at 57933.94,50875.28 h60
  text "TP1" at 57933.94,50875.28 h60
  text "D14" at 58099.72,50838 h60
  text "D14" at 58099.72,50838 h60
  text "P4" at 55566,50798.61 h60
  text "P4" at 55566,50798.61 h60
  text "J18" at 55787.63,50773.94 h60
  text "J18" at 55787.63,50773.94 h60
  text "J20" at 56602.63,50773.94 h60
  text "J20" at 56602.63,50773.94 h60
  text "P2" at 57944,50712.02 h60
  text "P2" at 57944,50712.02 h60
  text "C23" at 57473,50628 h60
  text "C23" at 57473,50628 h60
  text "F1" at 57792,50601 h60
  text "F1" at 57792,50601 h60
  text "P5" at 55566,50598.75 h60
  text "P5" at 55566,50598.75 h60
  text "J16" at 55938,50552 h60
  text "J16" at 55938,50552 h60
  text "R142" at 56107.74,50443.95 h60 r90
  text "R142" at 56107.74,50443.95 h60 r90
  text "P6" at 55566,50401 h60
  text "P6" at 55566,50401 h60
  text "D1" at 57757.37,50398.06 h60
  text "D1" at 57757.37,50398.06 h60
  text "D8" at 56409.81,50257.81 h60
  text "D8" at 56409.81,50257.81 h60
  text "DS4" at 55968,50257 h60
  text "DS4" at 55968,50257 h60
  text "DS3" at 56037,50256 h60
  text "DS3" at 56037,50256 h60
  text "D6" at 56255,50256 h60
  text "D6" at 56255,50256 h60
  text "D10" at 55995,50254.54 h60
  text "D10" at 55995,50254.54 h60
  text "D9" at 56115,50254.54 h60
  text "D9" at 56115,50254.54 h60
  text "D5" at 56185,50254.54 h60
  text "D5" at 56185,50254.54 h60
  text "D7" at 56329.19,50254.54 h60
  text "D7" at 56329.19,50254.54 h60

## Text inside footprints (layer, text, board x,y; h text height)
S1: Top Overlay "1" at 5341.33,4138.61 h35; M5 Assembly Top "1" at 5403,4184 h15
S2: Top Overlay "1" at 5137.15,3749.16 h35; M5 Assembly Top "1" at 5198,3824 h15
ZZ1: M5 Assembly Top "Install label in silkscreened box after final wash.  Text shall be 8 pt font.  Text shall be per the Label Table in the PDF schematic." at 2394.62,2794.36 h40